# Altium PCB PCB.PcbDoc
Units mil, origin at the board's own origin, x right, y up, seen from the top; angles counter-clockwise.
Board outline 1951.21 x 1142.68 mil, 2 copper layers (Top Layer, Bottom Layer); 32 components, 52 nets, 139 pads, 58 vias.
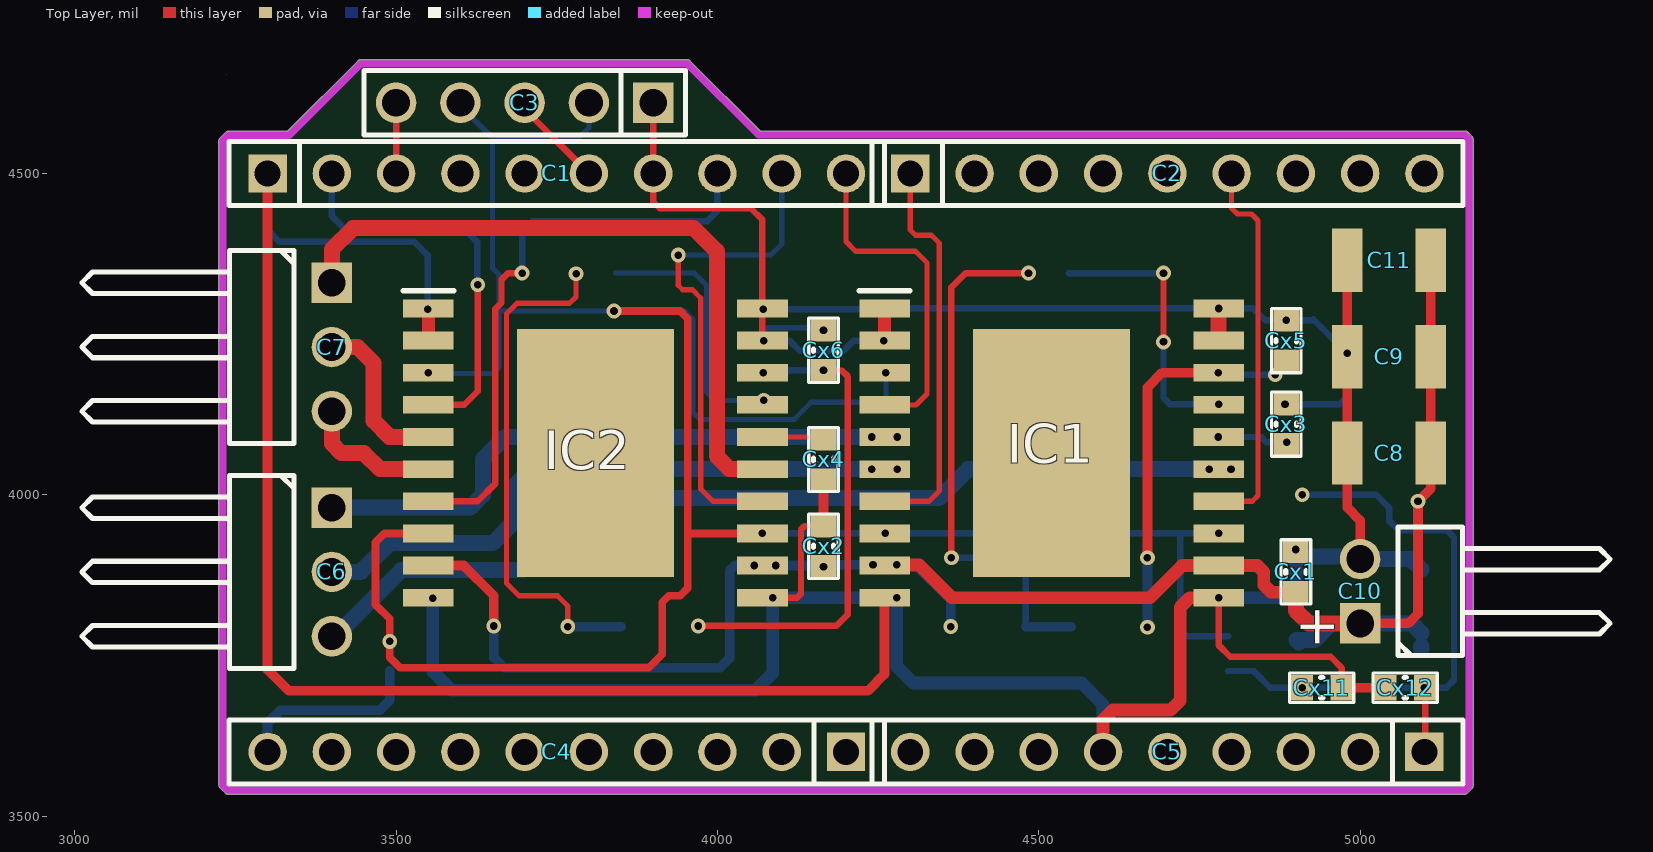
[diagram p0: Top Layer view]
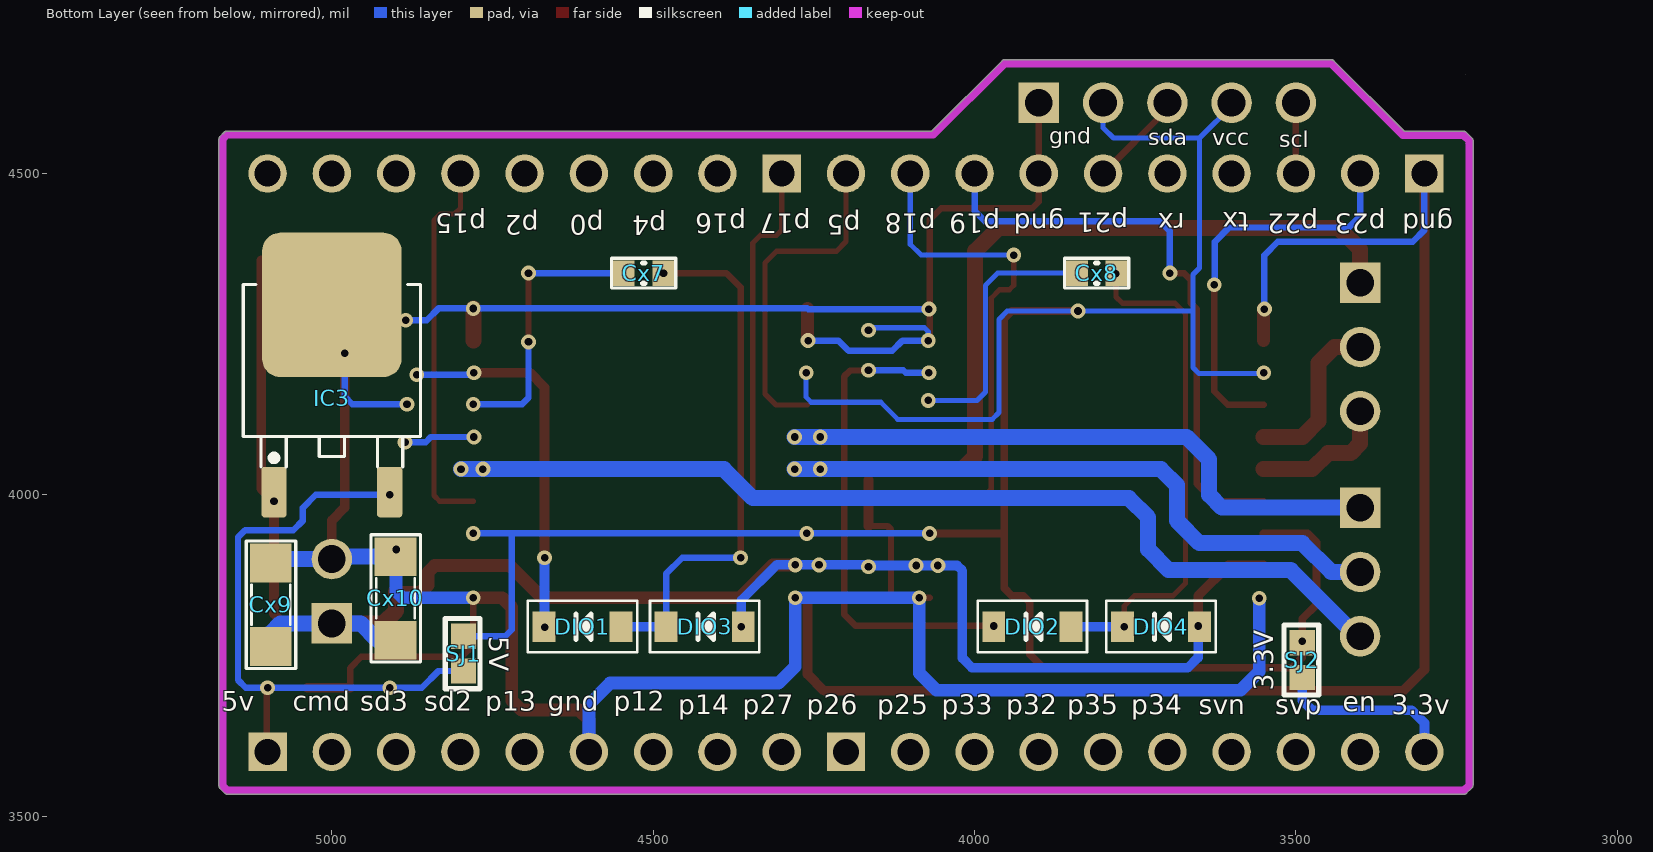
[diagram p1: Bottom Layer view, seen from below]
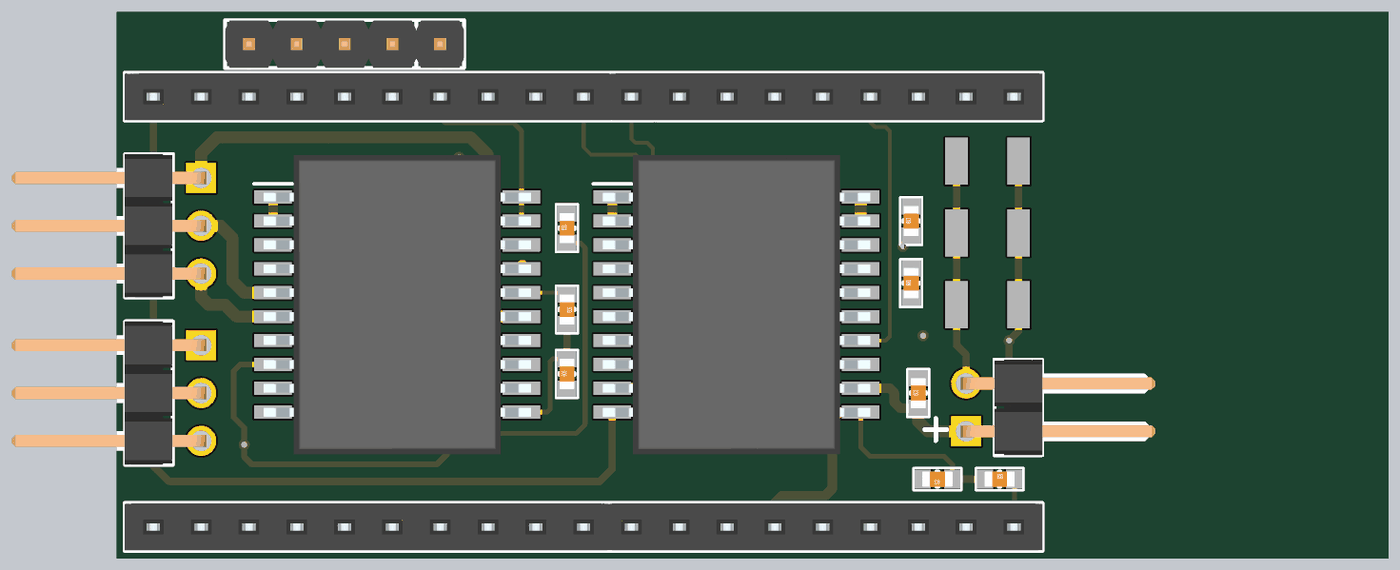
[diagram p2: 3D render of the assembled board from above, using the file's embedded part models]
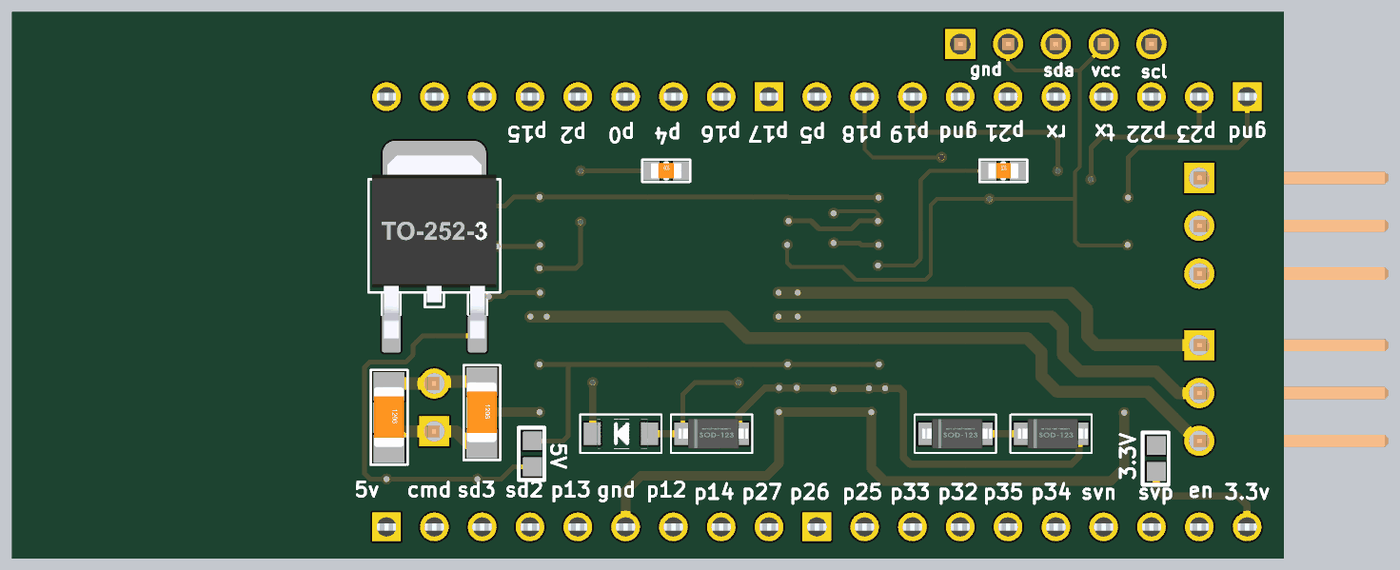
[diagram p3: 3D render of the assembled board from below, using the file's embedded part models]

## Layer stack, top to bottom
Top Solder: solder mask 0.4, Solder Resist, Dk 3.5
Top Layer: signal copper 1.4
Dielectric 1: dielectric 12.6, FR-4, Dk 4.8
Bottom Layer: signal copper 1.4
Bottom Solder: solder mask 0.4, Solder Resist, Dk 3.5

## Board outline
3226.93,3543.44 cw(c3231.1,3547.64) 3226.92,3543.45 cw(c3231.1,3547.64) 3226.9,3543.47 3226.93,3543.44 3234.4,3535.97 3234.38,3535.99 ccw(c3238.58,3540.16) 3238.58,3534.24 5162.6,3534.24 ccw(c5162.6,3540.16) 5166.8,3535.99 5166.78,3535.97 5173.87,3543.06 5173.86,3543.04 ccw(c5169.69,3547.24) 5175.61,3547.24 5175.61,4553.54 ccw(c5169.69,4553.54) 5173.86,4557.74 5173.87,4557.73 5167.41,4564.19 5167.43,4564.17 ccw(c5163.23,4560) 5163.23,4565.92 4066.45,4565.92 3957.19,4675.19 3957.2,4675.17 ccw(c3953,4671) 3953,4676.92 3445,4676.92 ccw(c3445,4671) 3440.8,4675.17 3440.81,4675.19 3331.39,4565.76 3239.37,4565.76 ccw(c3239.37,4559.84) 3235.17,4564.01 3235.18,4564.03 3226.13,4554.97 3226.14,4554.99 ccw(c3230.32,4550.79) 3224.39,4550.79 3224.39,3548.43 ccw(c3230.32,3548.43) 3226.14,3544.22 3226.13,3544.24
cut-out: 5882.68,4267.72
cut-out: 3236.22,4546.06
cut-out: 3236.22,4653.54
cut-out: 3236.22,4653.54

## Design rules (kind name [scope] priority, off if disabled: settings)
Clearance [All] p1: gap=6 ignorepadtopadclearanceinfootprint=FALSE
DiffPairsRouting [All] p1: maxlimit=10 minlimit=6 mostfreqgap=10 toplayer_minwidth=8 toplayer_maxwidth=15 toplayer_prefwidth=15 bottomlayer_minwidth=8 bottomlayer_maxwidth=15 bottomlayer_prefwidth=15 maxuncoupledlength=500
PolygonConnect [All] p1: connectstyle=Relief reliefconductorwidth=10 reliefentries=4 polygonreliefangle="90 Angle" airgapwidth=10
RoomDefinition schematic [InComponentClass('schematic')] p1: confinementstyle=ConfineIn formatcopy=TRUE lockcomponents=FALSE outline 3840,2270 4475,2270 4475,3410 3840,3410
RoutingVias [All] p1: holewidth=19.68 width=10 viastyle="Through Hole" minholewidth=11.81 minwidth=15.75 maxholewidth=28 maxwidth=50
SolderMaskExpansion [All] p1: expansion=4
Width [All] p1: maxlimit=50 minlimit=6 preferedwidth=10
29 further rules are at their usual default settings.

## Components (designator, comment, footprint, x,y, rotation, side; value= is the part's Value field where it differs from the comment)
C1 "JP10" JP10-C1T 3300,4500 r0 top locked
C2 "JP9" JP9-C1T 4700,4500 r0 top locked
C3 "JP5" JP5-D1T 3900,4610 r180 top
C4 "JP10" JP10-C1T 4200,3600 r180 top locked
C5 "JP9" JP9-C1T 4700,3600 r180 top locked
C6 "JP3" JP3-D1C 3300,3730 r270 top
C7 "JP3" JP3-D1C 3300,4080 r270 top
C8 "" EIA3528 5045,4065 r0 top
C9 "" EIA3528 5045,4215 r0 top
C10 "JP2" JP2-D1C 5000,3800 r90 top
C11 "" EIA3528 5045,4365 r0 top
Cx1 "10u" CN-SMD-0603 4900,3880 r90 top value=33pF
Cx2 "10u" CN-SMD-0603 4165,3920 r90 top value=33pF
Cx3 "1u" CN-SMD-0603 4885,4110 r90 top value=33pF
Cx4 "1u" CN-SMD-0603 4165,4055 r270 top value=33pF
Cx5 "220n" CN-SMD-0603 4885,4240 r90 top value=33pF
Cx6 "220n" CN-SMD-0603 4165,4225 r90 top value=33pF
Cx7 "10n" CN-SMD-0603 4515,4345 r180 bottom value=33pF
Cx8 "10n" CN-SMD-0603 3810,4345 r180 bottom value=33pF
Cx9 "XXpF" CN-SMD-1206 5095,3830 r270 bottom value=33pF
Cx10 "XXpF" CN-SMD-1206 4901,3840 r270 bottom value=33pF
Cx11 "10u" CN-SMD-0603 4940,3700 r180 top value=33pF
Cx12 "10u" CN-SMD-0603 5070,3700 r0 top value=33pF
DIO1 "Diode SMD" DIO-SMD-123 4610,3795 r180 bottom value=1N5007
DIO2 "Diode SMD" DIO-SMD-123 3910,3795 r180 bottom value=1N5007
DIO3 "Diode SMD" DIO-SMD-123 4420,3795 r180 bottom value=1N5007
DIO4 "Diode SMD" DIO-SMD-123 3710,3795 r180 bottom value=1N5007
IC1 "L6234PD" SOIC127P1420X360-21N 4519.84,4065 r0 top
IC2 "L6234PD" SOIC127P1420X360-21N 3810.16,4065 r0 top
IC3 "LM78xx" TO252-123 5000,4150 r180 bottom
SJ1 "5V" SJ-SMD 4792.05,3729.8 r90 bottom
SJ2 "3.3V" SJ-SMD 3487.05,3719.8 r90 bottom

## Footprints (in the part's own frame and the unit in brackets; to place one, negate y for a bottom-side part, rotate by r counter-clockwise, add the part's x,y. Pads: shape width x height; smd on the part's side, far side on the other; paste and mask are expansions set on the pad)
CN-SMD-0603 [mm]
  rect 0.9x1 smd: 1(-0.8,0) 2(0.8,0)
  silkscreen extent -1.27,-0.58 1.27,0.58, body extent -0.8,-0.4 0.8,0.4, height 0.3
CN-SMD-1206 [mil]
  rect 60x65 smd: 1(-64,0) 2(66,0)
  silkscreen extent -98,-38 100,39, body extent -63,-31 63,31, height 40
DIO-SMD-123 [mm]
  rect 0.9x1.2 smd: 1(1.524,0) 2(-1.524,0)
  silkscreen extent -2.16,-1.02 2.16,1.02, body extent -1.76,-0.8 1.94,0.8, height 1.25
EIA3528 [mm]
  rect 1.2x2.5 smd: A(1.65,0) C(-1.65,0)
JP2-D1C [mm] "2 pins, 1 row, right angled, gold plating"
  rect 1.6x1.6 hole 1.1: 1(0,0)
  round 1.6 hole 1.1: 2(2.54,0)
  silkscreen extent -1.27,-9.88 3.81,-1.5, body extent -1.27,-10.06 3.81,0.3, height 2.55
JP3-D1C [mm] "3 pins, 1 row, right angled, gold plating"
  rect 1.6x1.6 hole 1.1: 1(-6.35,2.54)
  round 1.6 hole 1.1: 2(-3.81,2.54) 3(-1.27,2.54)
  silkscreen extent -7.62,-7.34 0,1.04, body extent -7.62,-7.52 0,2.84, height 2.55
JP5-D1T [mm] "5 pins, 1 row, straight, gold plating"
  rect 1.6x1.6 hole 1.1: 1(0,0)
  round 1.6 hole 1.1: 2(2.54,0) 3(5.08,0) 4(7.62,0) 5(10.16,0)
  silkscreen extent -1.27,-1.27 11.43,1.27, body extent -1.27,-1.27 11.43,1.27, height 8.54
JP9-C1T [mm] "9 row, straight, gold plating"
  rect 1.52x1.52 hole 1.02: 1(-10.16,0)
  round 1.52 hole 1.02: 2(-7.62,0) 3(-5.08,0) 4(-2.54,0) 5(0,0) 6(2.54,0) 7(5.08,0) 8(7.62,0) 9(10.16,0)
  silkscreen extent -11.68,-1.27 11.68,1.27, body extent -11.68,-1.25 11.68,1.25, height 8.51
JP10-C1T [mm] "10 row, straight, gold plating"
  rect 1.52x1.52 hole 1.02: 1(0,0)
  round 1.52 hole 1.02: 2(2.54,0) 3(5.08,0) 4(7.62,0) 5(10.16,0) 6(12.7,0) 7(15.24,0) 8(17.78,0) 9(20.32,0) 10(22.86,0)
  silkscreen extent -1.52,-1.27 24.38,1.27, body extent -1.52,-1.25 24.38,1.25, height 8.51
SJ-SMD [mm]
  rect 1x1 smd: 1(-0.1,0.075) 2(1.275,0.075)
  silkscreen extent -0.8,-0.58 1.97,0.8
SOIC127P1420X360-21N [mm]
  rect 2x0.7 smd: 1(-6.6,5.715) 2(-6.6,4.445) 3(-6.6,3.175) 4(-6.6,1.905) 5(-6.6,0.635) 6(-6.6,-0.635) 7(-6.6,-1.905) 8(-6.6,-3.175) 9(-6.6,-4.445) 10(-6.6,-5.715) 11(6.6,-5.715) 12(6.6,-4.445) 13(6.6,-3.175) 14(6.6,-1.905) 15(6.6,-0.635) 16(6.6,0.635) 17(6.6,1.905) 18(6.6,3.175) 19(6.6,4.445) 20(6.6,5.715)
  rect 6.2x9.8 smd: 21(0,0)
  silkscreen extent -7.6,6.42 -5.6,6.42, body extent -7.1,-7.95 7.1,7.95, height 3.6
TO252-123 [mm]
  round 0.5 on Mech15: 0(0,0)
  rrect25% 1x2 smd: 1(-2.285,-3.7) 3(2.285,-3.7)
  rrect25% 5.5x5.7 smd: 2(0,3.7)
  silkscreen extent -3.5,-2.7 3.5,4.5, body extent -3.3,-3.95 3.3,5.76, height 2.31

## Part data
C1 C4: "WR-PHD 2.54 mm Angled Socket Header", Manufacturer="Würth Elektronik eiSos GmbH", partNo=613010143121, ComponentLink1 Description=Manufacturer, ComponentLink1URL=http://www.we-online.com, ComponentLink2 Description=Datasheet, ComponentLink2URL=http://katalog.we-online.de/em/datasheet/6130xx143121.pdf, Created by="Karrer Zheng", Created Date="29 March 2013", NoPins=10
C2 C5: "WR-PHD 2.54 mm Angled Socket Header", Manufacturer="Würth Elektronik eiSos GmbH", partNo=613009143121, ComponentLink1 Description=Manufacturer, ComponentLink1URL=http://www.we-online.com, ComponentLink2 Description=Datasheet, ComponentLink2URL=http://katalog.we-online.de/em/datasheet/6130xx143121.pdf, Created by="Karrer Zheng", Created Date="29 March 2013", NoPins=09
C3: "WR-PHD 2.54 mm Angled Socket Header", Manufacturer="Würth Elektronik eiSos GmbH", partNo=613005143121, ComponentLink1 Description=Manufacturer, ComponentLink1URL=http://www.we-online.com, ComponentLink2 Description=Datasheet, ComponentLink2URL=http://katalog.we-online.de/em/datasheet/6130xx143121.pdf, Created by="Karrer Zheng", Created Date="29 March 2013", NoPins=05
C6 C7: "WR-PHD 2.54 mm Angled Socket Header", Manufacturer="Würth Elektronik eiSos GmbH", partNo=613003143121, ComponentLink1 Description=Manufacturer, ComponentLink1URL=http://www.we-online.com, ComponentLink2 Description=Datasheet, ComponentLink2URL=http://katalog.we-online.de/em/datasheet/6130xx143121.pdf, Created by="Karrer Zheng", Created Date="29 March 2013", NoPins=03
C8 C9 C11: library part 47UF-POLAR-EIA3528-10V-10%, Package=EIA3528, DeviceName=-EIA3528-10V-10%, DeviceSetName=47UF-POLAR, GateName_1=G$1, LibraryName=SparkFun-Capacitors, PROD_ID=CAP-08310, SymbolName_1=CAP_POL
C10: "WR-PHD 2.54 mm Angled Socket Header", Manufacturer="Würth Elektronik eiSos GmbH", partNo=613002143121, ComponentLink1 Description=Manufacturer, ComponentLink1URL=http://www.we-online.com, ComponentLink2 Description=Datasheet, ComponentLink2URL=http://katalog.we-online.de/em/datasheet/6130xx143121.pdf, Created by="Karrer Zheng", Created Date="29 March 2013", NoPins=02
Cx1 Cx2 Cx3 Cx4 Cx5 Cx6 Cx7 Cx8 Cx9 Cx10 Cx11 Cx12: library part CN
DIO1 DIO2 DIO3 DIO4: "Default Diode", Code - JEDEC=DO-214-AB, Published=8-Jun-2000, Publisher="Altium Limited", Revision="July-2002: Re-released for DXP Platform."
IC1 IC2: "Integrated Circuit", Manufacturer_Name=STMicroelectronics, Mouser Part Number=511-L6234PD, RS Part Number=0456444P, Allied_Number=70013599, Allied Price/Stock=http://www.alliedelec.com/stmicroelectronics-l6234pd/70013599/, Datasheet Link=http://docs-emea.rs-online.com/webdocs/0b34/0900766b80b3486b.pdf, Height=3.6mm, Manufacturer_Part_Number=L6234PD, Mouser Price/Stock=https://www.mouser.com/Search/Refine.aspx?Keyword=511-L6234PD, RS Price/Stock=http://uk.rs-online.com/web/p/products/0456444P
IC3: "Positive Voltage Regulator", ComponentLink1Description="Manufacturer Link", ComponentLink1URL=http://www.st.com/, ComponentLink2Description=Datasheet, ComponentLink2URL=http://www.st.com/stonline/products/literature/ds/2146/l78m05c.pdf, DatasheetVersion=Apr-1994, LatestRevisionDate=17-Jul-2002, LatestRevisionNote="Re-released for DXP Platform.", Note="Tab is connected to pin 3 (GND).", PackageDescription="TO, Thru-Hole, Vertical, Heatsink Mounted; 3 In-Line Leads; Pitch 2.54 mm; Pin sequence 1, 3, 2", PackageReference=ISOWATT220AB, PackageVersion=Jul-1998, Published=24-Aug-2001, Publisher="Altium Limited"
SJ1 SJ2: library part SJ-SMD

## Via types
v1: diameter 23, hole 11.81, Top Layer to Bottom Layer, tented both sides, 58 vias

## Nets (pads, with @x,y where several pads share a name; then routed paths per layer and width w, separated by ;. In a path a pad name is that pad's centre, name@x,y a point inside that pad or via, vN(x,y) a via of type N, cw(c..) or ccw(c..) an arc to the next point about the centre after c; other vN are vias at no path point)
3.3v: C4.10 SJ2.1 | length 295.4
  Bottom Layer w15: C4.10 3300,3645 3320,3665 3475,3665 3490,3680 SJ2.1@3490,3725.87
5v: C5.1 Cx11.2 Cx12.2 IC3.3 SJ1.1 | length 964.4
  Top Layer w10: C5.1 5101.5,3601.5 Cx12.2
  Bottom Layer w10: SJ1.1 4834.13,3725.87 4860,3700 v1(4910,3700) v1(5100,3700) 5134,3700 5146,3712 5146,3934 5135,3945 5060,3945 5045,3960 5045,3980 5025,4000 v1(4910,4000)
clk: C2.9
cmd: C5.2
en: C4.9
gnd: C1.1 C1.7 C3.1 C5.6 C8.C C9.C C10.2 C11.C Cx1.2 Cx2.2 Cx3.2 Cx4.2 Cx5.2 Cx6.2 Cx9.1 Cx10.1 Cx11.1 Cx12.1 IC1.1 IC1.2 IC1.10 IC1.11 IC1.19 IC1.20 IC2.1 IC2.2 IC2.10 IC2.11 IC2.19 IC2.20 IC3.2 | length 7810.5
  Top Layer w10: C3.1 C1.7 3900,4456 3910,4446 4052,4446 4070,4428 IC2.20 ; IC2.11 v1(4086,3840) 4124,3840 4130,3846 4130,3946 4135.5,3951.5 Cx2.2 ; IC2.19 IC2.20@4070,4289 ; IC1.11 4779.69,3766.32 4798,3748 4954,3748 4971.5,3730.5 Cx11.1
  Top Layer w15: C1.1 3300,3728 3333,3695 4234,3695 4260,3721 IC1.10 ; Cx2.2 Cx4.2 ; Cx11.1 Cx12.1 ; C9.C C8.C 4980.04,3979.96 5000,3960 C10.2 ; v1(4980,4220) C11.C
  Top Layer w20: IC2.2 IC2.1 ; IC1.2 IC1.1 ; C5.6 4600,3650 4615,3665 4705,3665 4720,3680 4720,3825 4735,3840 IC1.11
  Top Layer w25: IC1.19 IC1.20
  Bottom Layer w8: v1(4072,4240) 4072,4254 4078,4260 4161,4260 v1(4165,4256)
  Bottom Layer w10: C1.1 3300,4412 3318,4394 3528,4394 3549,4373 v1(3549,4289) ; v1(4071,4289) 4259,4289 4260,4290 v1(4780,4290) 4834,4290 4852.5,4271.5 v1(4885,4271.5) 4925.5,4271.5 4927,4273 v1(4980,4220) 4980,4153 4968,4141 v1(4883,4141) ; v1(4072,4240) 4112,4240 4128,4224 4196,4224 4212,4240 v1(4259,4240)
  Bottom Layer w20: v1(3557,3839) 3557,3725 3586,3696 4059,3696 4086,3723 v1(4086,3840) v1(4279,3840) 4279,3733 4305,3707 4567,3707 4600,3674 C5.6 ; v1(4780,3840) 4890,3840 4900,3850 v1(4900,3915)
  Bottom Layer w25: Cx10.1 4996,3904 C10.2 5079,3900 Cx9.1@5095,3884
MA1: C6.2 IC1.6 | length 978.5
  Bottom Layer w25: C6.2 3445,3880 3490,3925 3650,3925 3685,3960 3685,4015 3710,4040 v1(4240,4040) v1(4280,4040)
MA2: C6.1 IC1.5 | length 957.8
  Bottom Layer w25: C6.1 3615,3980 3635,4000 3635,4055 3670,4090 v1(4280,4090)
  other v1: 4240,4090
MA3: C6.3 IC1.15 | length 1536
  Bottom Layer w25: C6.3 3405,3780 3508,3883 3698,3883 3730,3915 3730,3965 3760,3995 4345,3995 4390,4040 v1(4765,4040) v1(4799,4040)
MB1: C7.3 IC2.6 | length 216.9
  Top Layer w25: C7.3 3400,4080 3415,4065 3450,4065 3475,4040 IC2.6
MB2: C7.2 IC2.5 | length 261
  Top Layer w25: C7.2 3440,4230 3465,4205 3465,4115 3490,4090 IC2.5
MB3: C7.1 IC2.15 | length 1077.9
  Top Layer w25: C7.1 3400,4382 3433,4415 3963,4415 3999,4379 3999,4060 4019,4040 IC2.15
NetCx5_1: Cx5.1 DIO1.2 IC1.18 | length 583.5
  Top Layer w15: v1(4669,3902) 4669,4167 4692,4190 v1(4779,4190) IC1.18
  Bottom Layer w10: v1(4779,4190) 4782,4187 v1(4868,4187)
  Bottom Layer w15: v1(4669,3794) v1(4669,3902)
NetCx6_1: Cx6.1 DIO2.2 IC2.18 | length 748
  Top Layer w10: v1(3970,3796) 4185,3796 4203,3814 4203,4184 4193.5,4193.5 Cx6.1
  Bottom Layer w10: v1(4071,4190) 4107,4190 4111,4194 v1(4165,4194)
NetCx7_1: Cx7.1 IC1.17 | length 428.6
  Top Layer w10: v1@4694,4239 v1(4694,4345)
  Bottom Layer w10: Cx7.1 v1@4692,4345 ; v1(4694,4238) 4694,4151 4704,4141 v1(4780,4141)
NetCx7_2: Cx7.2 DIO1.1 DIO3.2 | length 826.5
  Top Layer w10: v1(4364,3902) 4364,4323 4386,4345 v1(4484,4345)
  Bottom Layer w10: v1@4366,3902 4455,3902 4480,3877 DIO3.2
  Bottom Layer w15: DIO3.2 DIO1.1
NetCx8_1: Cx8.1 IC2.17 | length 409.8
  Bottom Layer w8: Cx8.1 3964,4345 3983,4326 3983,4160 3996,4147 v1(4072,4147)
NetCx8_2: Cx8.2 DIO2.1 DIO4.2 | length 796.3
  Top Layer w8: v1(3767,3795) 3767,3827 3751,3843 3691,3843 3672,3862 3672,4282 3688,4298 3770,4298 3780,4308 v1(3780,4344)
  Bottom Layer w15: DIO4.2 DIO2.1
p0: C2.4
p2: C2.5
p4: C2.3
p5/pwm2: C1.10 IC1.4 | length 522.7
  Top Layer w8: C1.10 4200,4394 4215,4379 4308,4379 4326,4361 4326,4157 4309,4140 IC1.4
p12: C5.7
p13: C5.5
p14: C5.8
p15/pwm3: C2.6 IC1.14 | length 595.9
  Top Layer w8: IC1.14 4832,3990 4841,3999 4841,4427 4831,4437 4809,4437 4800,4446 C2.6
p16: C2.2
p17/pwm1: C2.1 IC1.7 | length 618.9
  Top Layer w8: IC1.7 4329,3990 4345,4006 4345,4392 4333,4404 4308,4404 4300,4412 C2.1
p18/pwm6: C1.9 IC2.14 | length 769.2
  Top Layer w8: v1(3939,4373) 3939,4326 3946,4319 3961,4319 3974,4306 3974,4009 3993,3990 IC2.14
  Bottom Layer w8: v1(3939,4373) 4083,4373 4100,4390 C1.9
p19/pwm4: C1.8 IC2.7 | length 913.4
  Top Layer w10: IC2.7 3627,3990 3654,4017 3654,4289 3664,4299 3664,4335 3674,4345 v1(3696,4345)
  Bottom Layer w10: v1(3696,4345) 3696,4410 3712,4426 3984,4426 4000,4442 C1.8
p21: C1.6 C3.3 | length 151.4
  Top Layer w10: C3.3 3700,4600 C1.6
p22: C1.3 C3.5 | length 110
  Top Layer w10: C1.3 C3.5
p23/pwm5: C1.2 IC2.4 | length 627
  Top Layer w10: IC2.4 3606,4140 3627,4161 v1(3627,4327)
  Bottom Layer w10: C1.2 3400,4434 3418,4416 3604,4416 3626,4394 v1@3626,4327
p25: C4.2
p26: C4.1
p27: C5.9
p32: C4.4
p33: C4.3
p34: C4.6
p35: C4.5
rx: C1.5
sd0: C2.8
sd1: C2.7
sd2: C5.4
sd3: C5.3
svn: C4.7
svp: C4.8
tx: C1.4
Vcc: C3.2 C3.4 IC1.3 IC1.8 IC1.13 IC2.3 IC2.8 IC2.13 SJ1.2 SJ2.2 | length 3985.8
  Top Layer w12: IC2.8 3482,3940 3468,3926 3468,3829 3490,3807 v1(3490,3772) 3490,3747 3506,3731 3893,3731 3914,3752 3914,3833 3924,3843 3942,3843 3954,3855 3954,4274 3942,4286 v1@3843,4286 ; 3960,3940 v1(4070,3940)
  Bottom Layer w8: v1@3550,4189 3651,4189 3660,4198 3660,4287 ; C3.4@3597.5,4607.5 3650,4555 ; 3651,4554 3650,4555 ; C3.2 3800,4571 3784,4555 3650,4555 ; v1(4262,4190) 4262,4152 4254,4144 4146,4144 4119.5,4117.5 3972.5,4117.5 3962,4128 3962,4273 3949,4286 v1(3839,4286) 3661,4286 3660,4287 ; 3650,4555 3650,4353 3660,4343 3660,4287
  Bottom Layer w10: v1(4070,3940) v1(4261,3940) 4721,3940 ; v1(4780,3940) 4721,3940 ; SJ1.2 4730,3780 4720,3790 4720,3939 4721,3940
  other v1: 3550,4190
VIN: C8.A C9.A C10.1 C11.A Cx1.1 Cx2.1 Cx9.2 Cx10.2 DIO3.1 DIO4.1 IC1.9 IC1.12 IC2.9 IC2.12 IC3.1 | length 2849.8
  Top Layer w15: IC2.9 3605,3890 3652,3843 v1(3652,3796) ; C10.1 5075,3800 5090,3815 v1(5090,3990) 5109.96,4009.96 C8.A C9.A C11.A
  Top Layer w20: v1(4279,3891) 4314,3891 4365,3840 4673,3840 4723,3890 IC1.12 4840,3890 4850,3880 4850,3860 4861.5,3848.5 Cx1.1
  Top Layer w25: Cx1.1 4900,3820 4920,3800 C10.1
  Bottom Layer w15: v1(3652,3796) 3652,3747 3668,3731 4004,3731 4019,3746 4019,3882 4027,3890 v1(4091,3890) 4163,3890 v1(4165,3888) 4168,3891 v1(4279,3891) 4308,3891 4363,3836 v1(4363,3795)
  Bottom Layer w25: Cx10.2@4905,3770 Cx10.2 4929,3774 4955,3800 C10.1 5080,3800 Cx9.2@5095,3785 ; Cx9.2@5095,3760 Cx9.2
  other v1: 4057,3890 4242,3891
Vref1: Cx3.1 IC1.16 | length 110.3
  Bottom Layer w10: v1(4779,4090) 4846,4090 4854,4082 v1(4886,4082)
Vref2: Cx4.1 IC2.16 | length 96.5
  Top Layer w8: IC2.16 4161.5,4090 Cx4.1
pads on no net: IC1.21 IC2.21 IC3.0

## Keep-outs
Keep-Out Layer:
  lines w11.81: 3230.32,3548.43 3231.1,3547.64 3238.58,3540.16 5162.6,3540.16 5169.69,3547.24 5169.69,4549.21 5169.69,4553.54 5163.23,4560 4064,4560 3953,4671 3949,4671 3453,4671 3445,4671 3333.84,4559.84 3239.37,4559.84 3230.32,4550.79 3230.32,3548.43

## Silkscreen, mask and mechanical layers (free items; w line width, h text height)
Top Overlay:
  text "+" at 4960,3760 h60 r90
Bottom Overlay:
  text "gnd" at 3884,4546 h25
  text "vcc" at 3630,4544 h25
  text "sda" at 3730,4544 h25
  text "scl" at 3526,4541 h25
  text "tx" at 3573,4440 h30 r180
  text "p21" at 3761,4439 h30 r180
  text "rx" at 3673,4438 h30 r180
  text "gnd" at 3255,4437 h30 r180
  text "p23" at 3360,4437 h30 r180
  text "p22" at 3465,4437 h30 r180
  text "gnd" at 3860,4437 h30 r180
  text "p19" at 3960,4437 h30 r180
  text "p18" at 4060,4437 h30 r180
  text "p17" at 4255,4437 h30 r180
  text "p16" at 4355,4437 h30 r180
  text "p15" at 4760,4437 h30 r180
  text "p5" at 4177,4435 h30 r180
  text "p0" at 4577,4435 h30 r180
  text "p2" at 4678,4435 h30 r180
  text "p4" at 4480,4434 h30 r180
  text "p12" at 4561,3664 h30
  text "gnd" at 4664,3664 h30
  text "p13" at 4761,3664 h30
  text "sd2" at 4856,3664 h30
  text "sd3" at 4956,3664 h30
  text "cmd" at 5061,3664 h30
  text "5v" at 5171,3664 h30
  text "en" at 3427,3663 h30
  text "3.3v" at 3351,3659 h30
  text "svp" at 3532,3659 h30
  text "svn" at 3651,3659 h30
  text "p34" at 3756,3659 h30
  text "p35" at 3856,3659 h30
  text "p32" at 3951,3659 h30
  text "p33" at 4051,3659 h30
  text "p25" at 4151,3659 h30
  text "p26" at 4261,3659 h30
  text "p27" at 4361,3659 h30
  text "p14" at 4461,3659 h30